# Altium PCB board.PcbDoc
Units mm, origin at the board's own origin, x right, y up, seen from the top; angles counter-clockwise.
Board outline 49 x 30 mm, 2 copper layers (Top Layer, Bottom Layer), stack 0.97 mm thick; 4 components, 8 nets, 24 pads, 0 vias.
Unrouted connection lines stored in the file: 2.
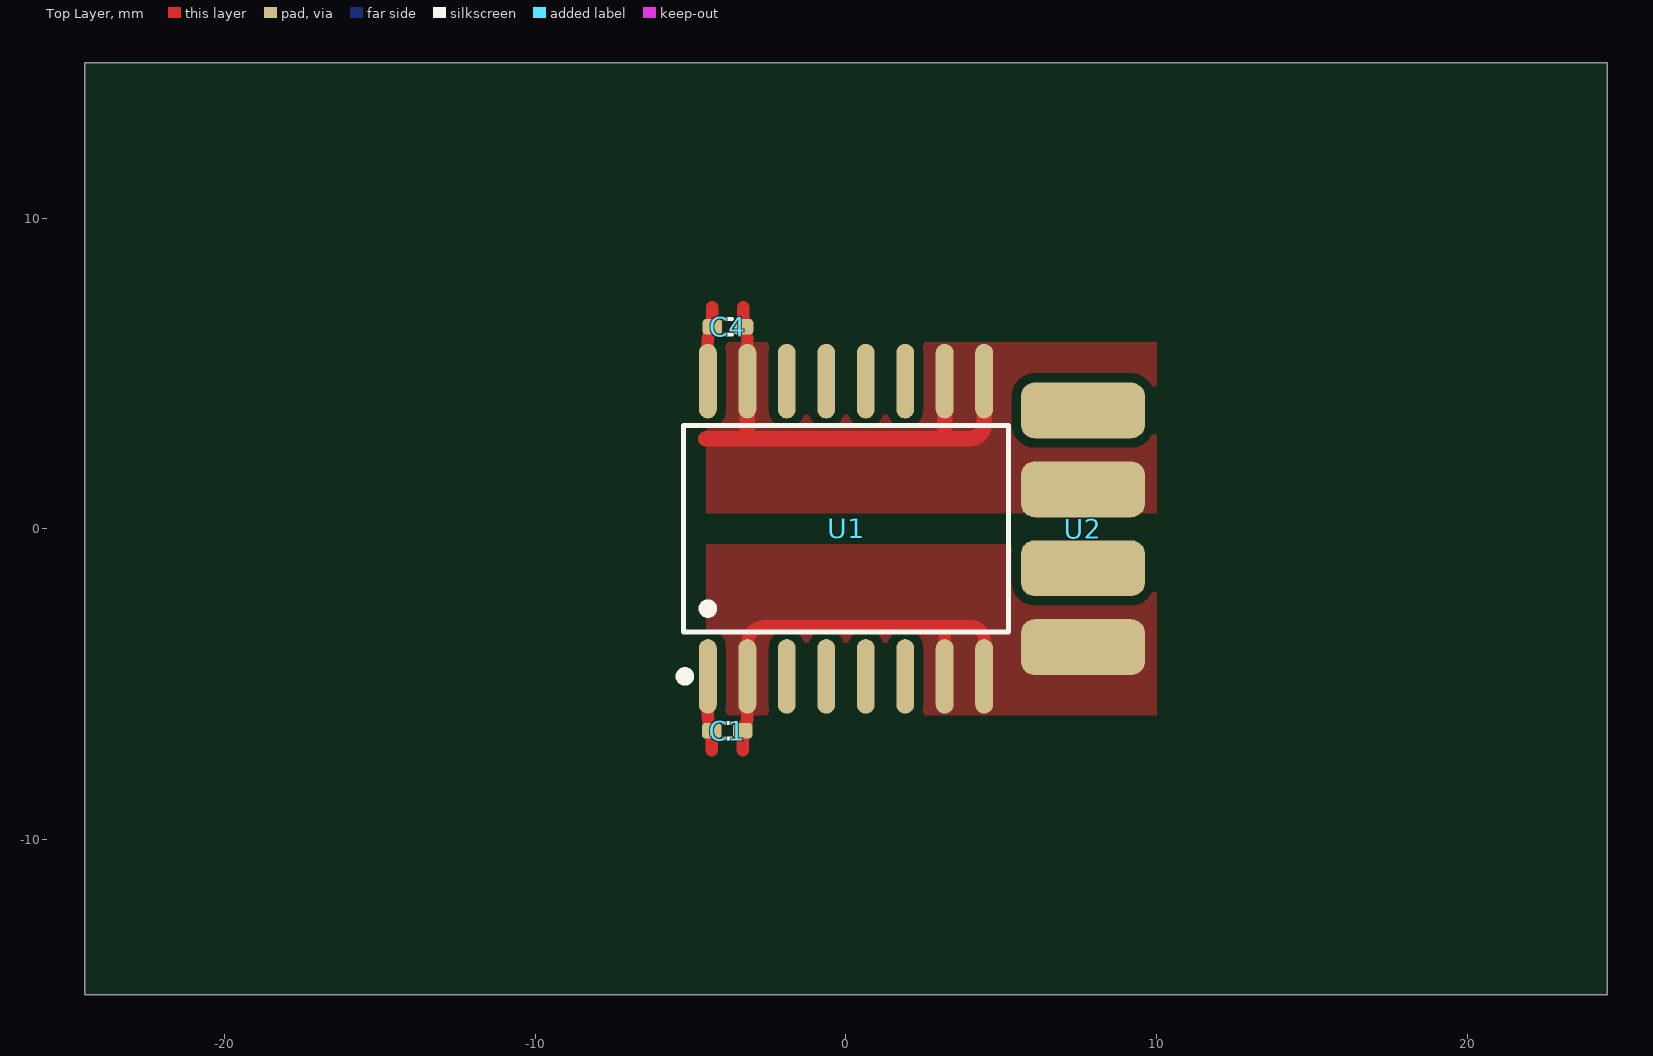
[diagram p0: Top Layer view]
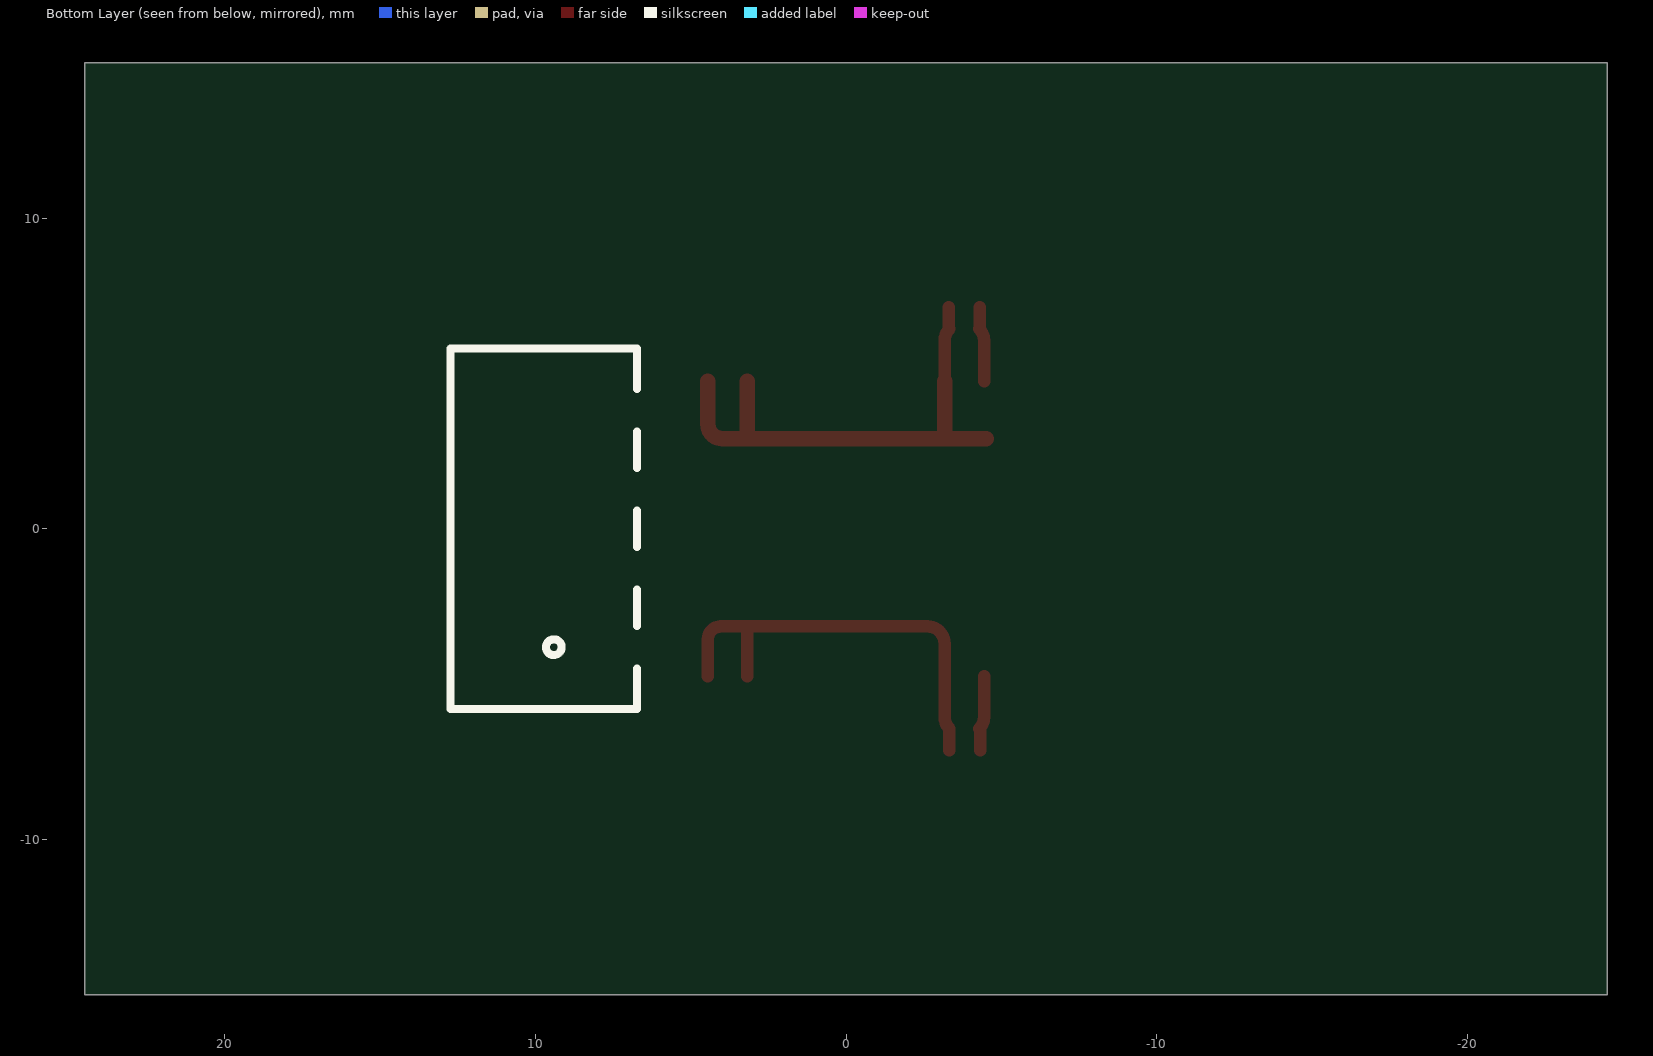
[diagram p1: Bottom Layer view, seen from below]
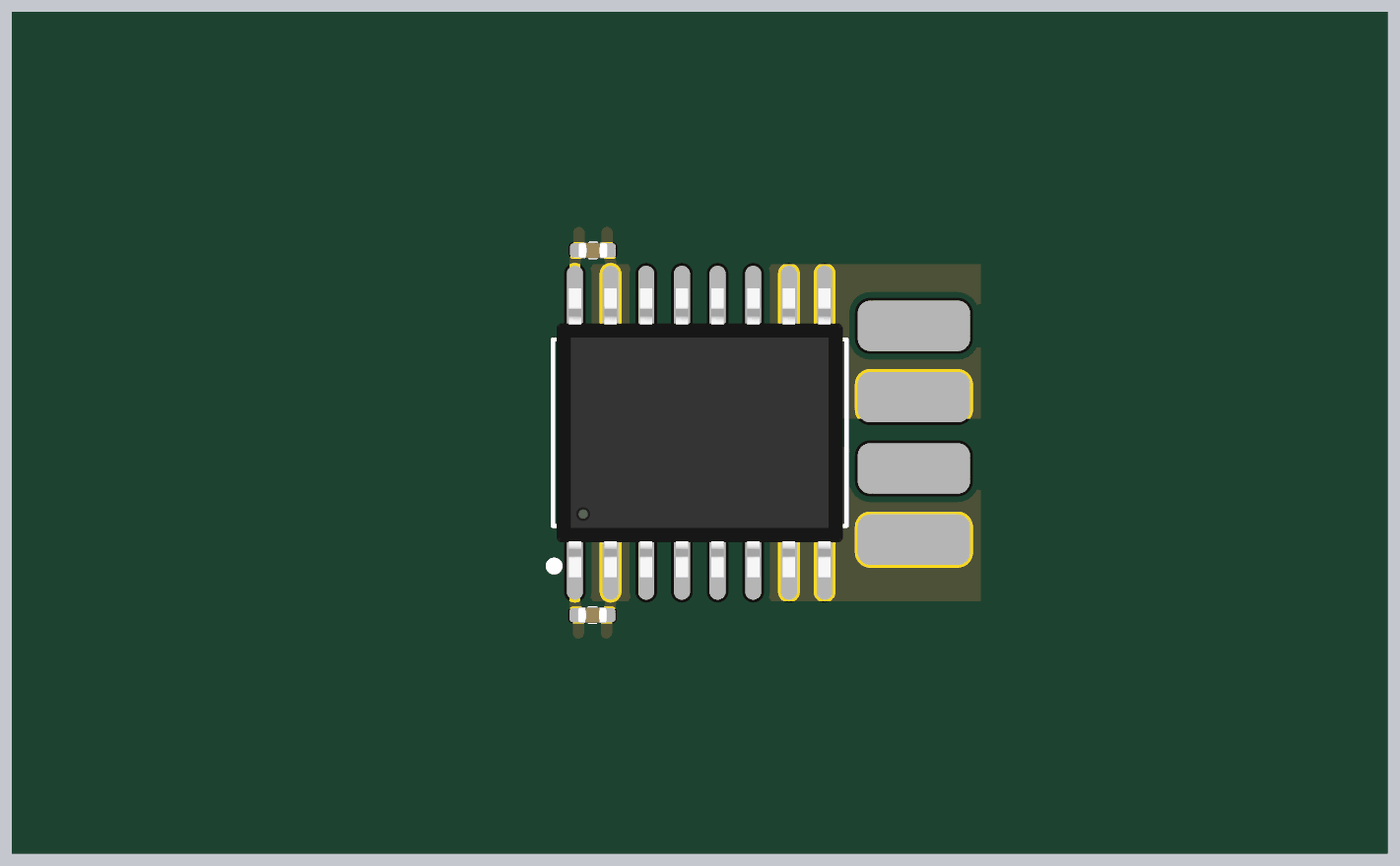
[diagram p2: 3D render of the assembled board from above, using the file's embedded part models]

## Layer stack, top to bottom
Top Solder: solder mask 0.0127, Solder Resist, Dk 3.8
Top Layer: signal copper 0.035
Dielectric: core 0.9, FR-4, Dk 4.5
Bottom Layer: signal copper 0.035
Bottom Solder: solder mask 0.0127, Solder Resist, Dk 3.8

## Board outline
-24.5,-15 24.5,-15 24.5,15 -24.5,15

## Design rules (kind name [scope] priority, off if disabled: settings)
AcuteAngle [All] p1: minimum=6.00000000000000E+0001 checktracksonly=FALSE
BoardOutlineClearance [All] p1: gap=0.3 ignorepadtopadclearanceinfootprint=FALSE
Clearance Clearance_1 [All] p1: gap=0.3 ignorepadtopadclearanceinfootprint=FALSE except(0.13: Arc-Arc Arc-Track Arc-SMDPad Arc-Via Track-Track Track-SMDPad Track-Via SMDPad-SMDPad SMDPad-Via THPad-Via Via-Via; 0.15: Arc-THPad Arc-Text Arc-Hole Track-THPad Track-Text Track-Hole SMDPad-THPad SMDPad-Text SMDPad-Hole THPad-THPad THPad-Text THPad-Hole Via-Text Via-Hole Fill-Text Fill-Hole Poly-Text Poly-Hole Region-Text Region-Hole Text-Text Text-Hole)
ComponentClearance ComponentClearance_1 [IsFree] p1: gap=-1 collisioncheckmode=3 verticalgap=2540 showdistances=FALSE
ComponentClearance [All] p2: gap=0.3 collisioncheckmode=3 verticalgap=0.254 showdistances=FALSE donotcheckwithout3dbody=TRUE
Height [All] p1: minheight=0 maxheight=500 prefheight=12.7
HoleSize [All] p1: absolutevalues=TRUE maxlimit=6 minlimit=0.2 maxpercent=80.000 minpercent=20.000
HoleToHoleClearance HoleToHoleClearance_1 [IsVia vs IsThruPin] p1: gap=0.7 allowstackedmicrovias=TRUE
HoleToHoleClearance [All] p2: gap=0.5 allowstackedmicrovias=TRUE
MinimumSolderMaskSliver [All] p1 off: minsoldermaskwidth=0.254
PlaneClearance [All] p1: clearance=0.45
PlaneConnect [All] p1: planeconnectstyle=Direct reliefexpansion=0.3 reliefentries=4 reliefconductorwidth=0.381 reliefairgap=0.178
PolygonConnect [All] p1: connectstyle=Direct reliefconductorwidth=0.381 reliefentries=4 polygonreliefangle="90 Angle" airgapwidth=0.356
RoutingVias [All] p1: holewidth=0.3 width=0.6 viastyle="Through Hole" minholewidth=0.2 minwidth=0.45 maxholewidth=0.9 maxwidth=1.27
SilkToSilkClearance [All] p1 off: silktosilkclearance=0.254
SilkToSolderMaskClearance [IsPad] p1 off: minsilkscreentomaskgap=0.254 clearancetoexposedcopper=TRUE
SolderMaskExpansion [All] p1: expansion=0.102 istentingtop=FALSE
SupplyNets "Schematic Supply Nets_4" [InNet('5V_ISOL')] p1: voltage=0.000
SupplyNets "Schematic Supply Nets_3" [InNet('C_GND')] p2: voltage=0.000
SupplyNets "Schematic Supply Nets_2" [InNet('5V')] p3: voltage=0.000
SupplyNets "Schematic Supply Nets" [InNet('GND')] p4: voltage=0.000
UnRoutedNet [All] p1: checkbadconnections=TRUE
Width [All] p1: maxlimit=3.81 minlimit=0.14 preferedwidth=0.254
20 further rules are at their usual default settings.

## Components (designator, comment, footprint, x,y, rotation, side; value= is the part's Value field where it differs from the comment)
C1 "100nF" C0402 -3.82,-6.5 r180 top
C4 "100nF" C0402 -3.8,6.5 r180 top
U1 "ISO1050DWR" SOIC-16_L10.3-W7.5-P1.27-LS10.3-BL 0,0 r0 top
U2 "B0505S-1WR3_C512048" PWRM-TH_BXXXXS-1WR3 7.625,0 r90 bottom

## Footprints (in the part's own frame and the unit in brackets; to place one, negate y for a bottom-side part, rotate by r counter-clockwise, add the part's x,y. Pads: shape width x height; smd on the part's side, far side on the other; paste and mask are expansions set on the pad)
C0402 [mm] "Chip Capacitor Body"
  rrect50% 0.635x0.508 smd mask+0.05: 1(-0.5,0) 2(0.5,0)
  silkscreen extent -0.13,-0.25 0.13,0.25, body extent -0.52,-0.27 0.53,0.28, height 0.55
PWRM-TH_BXXXXS-1WR3 [mm]
  rrect50% 1.8x4 smd far side: 1(-3.81,0) 2(-1.27,0) 3(1.27,0) 4(3.81,0)
  silkscreen extent -5.8,-0.9 5.8,5.1, body extent -5.8,-0.9 5.8,5.1, height 9.5
SOIC-16_L10.3-W7.5-P1.27-LS10.3-BL [mm]
  oval 0.574x2.401 smd: 1(-4.445,-4.75) 2(-3.175,-4.75) 3(-1.905,-4.75) 4(-0.635,-4.75) 5(0.635,-4.75) 6(1.905,-4.75) 7(3.175,-4.75) 8(4.445,-4.75) 9(4.445,4.75) 10(3.175,4.75) 11(1.905,4.75) 12(0.635,4.75) 13(-0.635,4.75) 14(-1.905,4.75) 15(-3.175,4.75) 16(-4.445,4.75)
  silkscreen extent -5.33,-4.9 5.23,3.32, body extent -5.1,-5.15 5.1,5.15, height 3.5

## Part data
C1 C4: library part CAP, "100nF 0402"

## Nets (pads, with @x,y where several pads share a name; then routed paths per layer and width w, separated by ;. In a path a pad name is that pad's centre, name@x,y a point inside that pad or via, vN(x,y) a via of type N, cw(c..) or ccw(c..) an arc to the next point about the centre after c; other vN are vias at no path point)
5V: C1.2 U1.1 U2.2 | length 2.4
  Top Layer w0.4: U1.1 -4.445,-6.06 ccw(c-3.915,-6.06) C1.2@-4.29,-6.435 ; -4.32,-7.135 C1.2
5V_ISOL: C4.2 U1.16 U2.4 | length 2.4
  Top Layer w0.4: U1.16 -4.445,6.06 cw(c-3.915,6.06) C4.2@-4.29,6.435 ; C4.2 -4.3,7.135
C_GND: C4.1 U1.9 U1.10 U1.15 U2.3 | length 16.7
  Top Layer w0.4: C4.1@-3.33,6.435 cw(c-3.705,6.06) -3.175,6.06 U1.15 ; C4.1 -3.3,7.135
  Top Layer w0.5: -4.518,2.9 -3.175,2.9 ; U1.15 -3.175,2.9 ; U1.10 3.175,2.9 ; U1.9 4.445,3.36 cw(c3.985,3.36) 3.985,2.9 3.175,2.9 ; -3.175,2.9 3.175,2.9
CAN_H: U1.13
CAN_L: U1.12
CAN_RX: U1.3
CAN_TX: U1.6
GND: C1.1 U1.2 U1.7 U1.8 U2.1 | length 14.4
  Top Layer w0.4: C1.1@-3.33,-6.435 ccw(c-3.705,-6.06) -3.175,-6.06 U1.2 -3.175,-3.696 cw(c-2.622,-3.696) -2.622,-3.143 3.175,-3.143 ; -3.32,-7.135 C1.1 ; U1.7 3.175,-3.143 ; U1.8 4.445,-3.555 ccw(c4.033,-3.555) 4.033,-3.143 3.175,-3.143
pads on no net: U1.4 U1.5 U1.11 U1.14

## Polygon pours and split planes (outlines as drawn)
C_GND on Top Layer "C_GND_L01_P000" (solid, remove dead copper, pour order 0): -4.5,0.5 10,0.5 10,6 -4.5,6
GND on Top Layer "GND_L01_P001" (solid, remove dead copper, pour order 1): -4.5,-0.5 10,-0.5 10,-6 -4.5,-6